# EAGLE board nav10_mxp_3_3_final_expio (EAGLE 6.5.0)
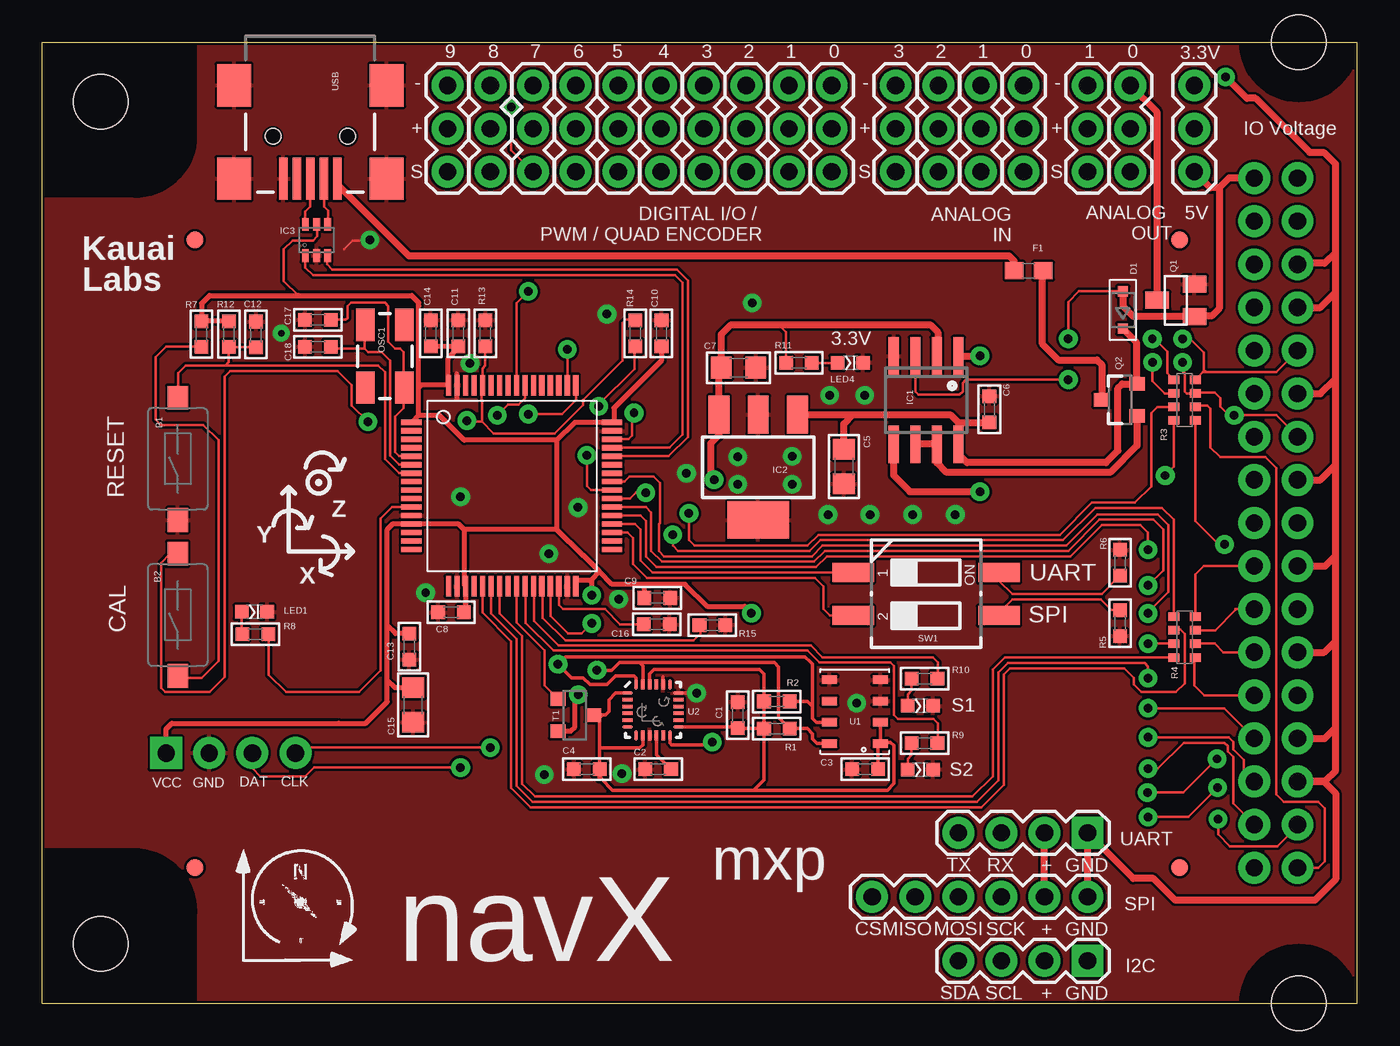
[diagram p0: board, top side]
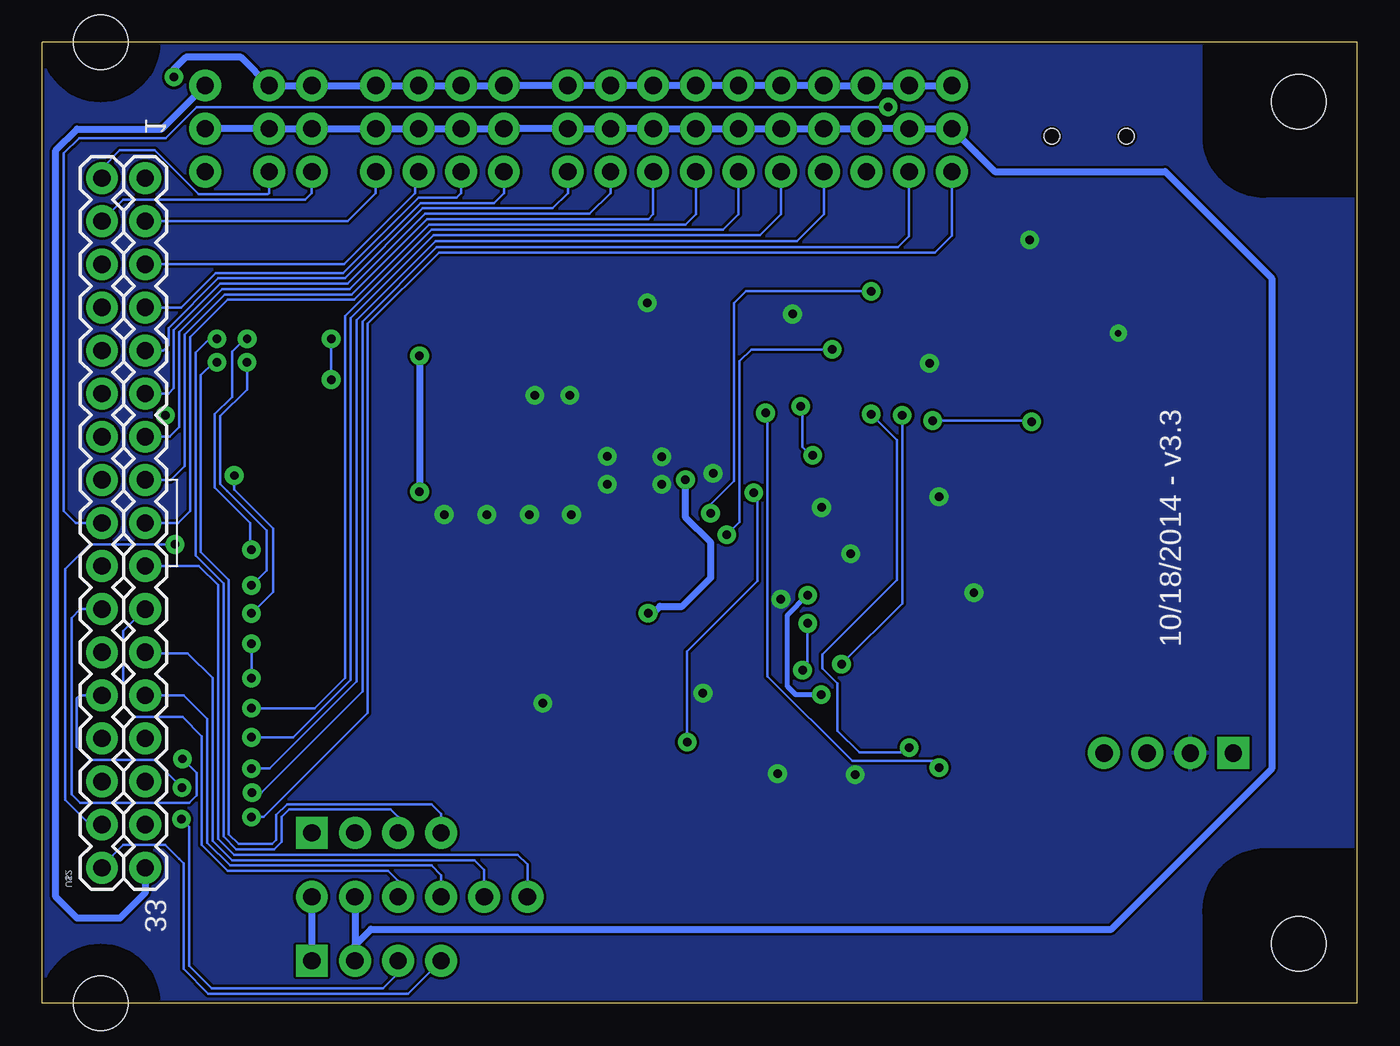
[diagram p1: board, bottom side, seen from below]

Size 77.47 x 56.64 mm. Coordinates in mm from the lower left corner, seen from the top.
Outline: 0,0 77.47,0 77.47,56.64 0,56.64 0,0
Copper layers (1*16): Top 0.018mm / dielectric 1.5mm / Bottom 0.018mm
Design rules "es-015mm *": minimum track width 0.15mm, minimum drill 0.4mm, track to track 0.15mm, track to pad 0.15mm, pad to pad 0.15mm, via to via 0.15mm, smd to smd 0.15mm, copper to edge 0.15mm, drill to drill 0.15mm, minimum pad ring 0.4mm, minimum via ring 0.3mm, stop-mask expansion 0mil, vias tented up to drill 25mil, thermal gap 0.15mm
Net classes: 2 RF: width 0.635 mm, clearance 0.762 mm
tRestrict: 6 lines
bRestrict: 6 lines

## Footprints (pad centres in the part's own frame; a part is rotated, then mirrored left to right if it is on the bottom)
TACTILE-SWITCH-1101NE = smd 1.4 x 1.2: P$1 -3.6,0; P$2 3.6,0
C0603 = smd 0.8 x 0.8: 1 -0.762,0; 2 0.762,0
C0805 = smd 1.2 x 1.3: 1 -1.016,0; 2 1.016,0
SOD-323 = smd 0.6 x 0.6: A 1.1,0; C -1.1,0
0603 = smd 1.1 x 1: 1 -0.85,0; 2 0.85,0
SO08 = smd 0.6 x 2.2: 1 -1.905,-2.6; 2 -0.635,-2.6; 3 0.635,-2.6; 4 1.905,-2.6; 5 1.905,2.6; 6 0.635,2.6; 7 -0.635,2.6; 8 -1.905,2.6
MCP1703DB = smd 1.219 x 2.235: 1 -2.311,-3.099; 2 0,-3.099; 3 2.311,-3.099 | smd 3.6 x 2.2: 4 0,3.099
SC70-6 = smd 0.4 x 0.75: 1 -0.65,-0.925; 2 0,-0.925; 3 0.65,-0.925; 4 0.65,0.925; 5 0,0.925; 6 -0.65,0.925
1X03 = drill 1.016 pad 1.88: 1 0,0; 2 2.54,0; 3 5.08,0
1X04 = drill 1.016 pad 1.88 square: 1 0,0 | drill 1.016 pad 1.88: 2 2.54,0; 3 5.08,0; 4 7.62,0
1X06 = drill 1.016 pad 1.88: 1 0,0; 2 2.54,0; 3 5.08,0; 4 7.62,0; 5 10.16,0; 6 12.7,0
FIDUCIAL-1X2 = smd 1 x 1: 1 0,0
CHIP-LED0603 = smd 0.8 x 0.8: A 0,-0.75; C 0,0.75
CRYSTAL-SMD-5X3 = smd 1.9 x 1.1: 1 -1.85,-1.15; 2 1.85,-1.15; 3 1.85,1.15; 4 -1.85,1.15
SOT23 = smd 1 x 1.4: 1 -0.95,-1.1; 2 0.95,-1.1; 3 0,1.1
SOT23-3 = smd 0.8 x 0.9: 1 -0.95,-1; 2 0.95,-1; 3 0,1.1
R0603 = smd 0.8 x 0.8: 1 -0.762,0; 2 0.762,0
0603_ARV = smd 0.5 x 0.65: 1 -1.2,-0.625; 2 -0.4,-0.625; 3 0.4,-0.625; 4 1.2,-0.625; 5 1.2,0.625; 6 0.4,0.625; 7 -0.4,0.625; 8 -1.2,0.625
CTS-219-02 = smd 1.13 x 2.44: 1 -1.27,-4.3; 2 1.27,-4.3; 3 1.27,4.3; 4 -1.27,4.3
MS5611 = smd 0.9 x 0.5: 1 -1.5,1.875; 2 -1.5,0.625; 3 -1.5,-0.625; 4 -1.5,-1.875; 5 1.5,-1.875; 6 1.5,-0.625; 7 1.5,0.625; 8 1.5,1.875
QFN24_3MM_INVENSENSE = smd 0.6 x 0.2: 1 -1.5,1; 2 -1.5,0.6; 3 -1.5,0.2; 4 -1.5,-0.2; 5 -1.5,-0.6; 6 -1.5,-1; 13 1.5,-1; 14 1.5,-0.6; 15 1.5,-0.2; 16 1.5,0.2; 17 1.5,0.6; 18 1.5,1 | smd 0.2 x 0.6: 7 -1,-1.5; 8 -0.6,-1.5; 9 -0.2,-1.5; 10 0.2,-1.5; 11 0.6,-1.5; 12 1,-1.5; 19 1,1.5; 20 0.6,1.5; 21 0.2,1.5; 22 -0.2,1.5; 23 -0.6,1.5; 24 -1,1.5
1X04_NO_SILK = drill 1.016 pad 1.88 square: 1 0,0 | drill 1.016 pad 1.88: 2 2.54,0; 3 5.08,0; 4 7.62,0
2X17 = drill 1.016 pad 1.88: 1 0,0; 2 0,-2.54; 3 -2.54,0; 4 -2.54,-2.54; 5 -5.08,0; 6 -5.08,-2.54; 7 -7.62,0; 8 -7.62,-2.54; 9 -10.16,0; 10 -10.16,-2.54; 11 -12.7,0; 12 -12.7,-2.54; 13 -15.24,0; 14 -15.24,-2.54; 15 -17.78,0; 16 -17.78,-2.54; 17 -20.32,0; 18 -20.32,-2.54; 19 -22.86,0; 20 -22.86,-2.54; 21 -25.4,0; 22 -25.4,-2.54; 23 -27.94,0; 24 -27.94,-2.54; 25 -30.48,0; 26 -30.48,-2.54; 27 -33.02,0; 28 -33.02,-2.54; 29 -35.56,0; 30 -35.56,-2.54; 31 -38.1,0; 32 -38.1,-2.54; 33 -40.64,0; 34 -40.64,-2.54
MXP_STANDOFF_FRONT = hole 3.2: 0,0
MXP_STANDOFF_REAR = hole 3.2: 0,0
TQFP-10X10-64 = smd 1.2 x 0.3: P$1 -5.936,3.75; P$2 -5.936,3.25; P$3 -5.936,2.75; P$4 -5.936,2.25; P$5 -5.936,1.75; P$6 -5.936,1.25; P$7 -5.936,0.75; P$8 -5.936,0.25; P$9 -5.936,-0.25; P$10 -5.936,-0.75; P$11 -5.936,-1.25; P$12 -5.936,-1.75; P$13 -5.936,-2.25; P$14 -5.936,-2.75; P$15 -5.936,-3.25; P$16 -5.936,-3.75; P$33 5.886,-3.75; P$34 5.886,-3.25; P$35 5.886,-2.75; P$36 5.886,-2.25; P$37 5.886,-1.75; P$38 5.886,-1.25; P$39 5.886,-0.75; P$40 5.886,-0.25; P$41 5.886,0.25; P$42 5.886,0.75; P$43 5.886,1.25; P$44 5.886,1.75; P$45 5.886,2.25; P$46 5.886,2.75; P$47 5.886,3.25; P$48 5.886,3.75 | smd 0.3 x 1.2: P$17 -3.75,-5.911; P$18 -3.25,-5.911; P$19 -2.75,-5.911; P$20 -2.25,-5.911; P$21 -1.75,-5.911; P$22 -1.25,-5.911; P$23 -0.75,-5.911; P$24 -0.25,-5.911; P$25 0.25,-5.911; P$26 0.75,-5.911; P$27 1.25,-5.911; P$28 1.75,-5.911; P$29 2.25,-5.911; P$30 2.75,-5.911; P$31 3.25,-5.911; P$32 3.75,-5.911; P$49 3.75,5.936; P$50 3.25,5.936; P$51 2.75,5.936; P$52 2.25,5.936; P$53 1.75,5.936; P$54 1.25,5.936; P$55 0.75,5.936; P$56 0.25,5.936; P$57 -0.25,5.936; P$58 -0.75,5.936; P$59 -1.25,5.936; P$60 -1.75,5.936; P$61 -2.25,5.936; P$62 -2.75,5.936; P$63 -3.25,5.936; P$64 -3.75,5.936
USB-MINIB = smd 2.5 x 0.5: D+ 2.5,0; D- 2.5,0.8; GND 2.5,-1.6; ID 2.5,-0.8; VBUS 2.5,1.6 | smd 2.5 x 2: MTN1 -3,4.5; MTN2 2.5,4.5; MTN3 -3,-4.5; MTN4 2.5,-4.5 | hole 0.9: 0,2.2; 0,-2.2

## Placement (x,y rotation side)
B1  RESET  [TACTILE-SWITCH-1101NE]  7.98,32.1 90 top
B2  CAL  [TACTILE-SWITCH-1101NE]  7.98,22.9 90 top
C1  .1uF  [C0603]  40.98,17 90 top
C2  .1uF  [C0603]  36.28,13.8 180 top
C3  .1uF  [C0603]  48.48,13.8 180 top
C4  .01uF  [C0603]  32.08,13.8 180 top
C5  10uF (10V. low ESR)  [C0805]  47.22,31.64 270 top
C6  .1uF  [C0603]  55.8,35.03 270 top
C7  22uF (6V)  [C0805]  41.03,37.47 0 top
C8  1uF  [C0603]  24.08,23.05 0 top
C9  1uF  [C0603]  36.23,23.9 180 top
C10  1uF  [C0603]  36.48,39.5 270 top
C11  1uF  [C0603]  24.5,39.5 270 top
C12  .1uF  [C0603]  12.58,39.42 270 top
C13  1uF  [C0603]  21.62,21.04 90 top
C14  1uF  [C0603]  22.88,39.5 270 top
C15  10uF  [C0805]  21.85,17.59 270 top
C16  4.7uF  [C0603]  36.2,22.35 180 top
C17  18pF  [C0603]  16.23,40.3 0 top
C18  18pF  [C0603]  16.23,38.7 0 top
D1  PMEG2010 (30V, 1A)  [SOD-323]  63.66,40.87 90 top
F1  375mA  [0603]  58.12,43.18 180 top
IC1  LM358D  [SO08]  52.07,35.56 180 top
IC2  MCP1703DB  [MCP1703DB]  42.18,31.6 180 top
IC3  USBUF02W6  [SC70-6]  16.15,44.99 0 top
JP1  DIGIO9  [1X03]  23.88,49.02 90 top
JP2  DIGIO8  [1X03]  26.4,49.02 90 top
JP3  MXP_UART  [1X04]  61.59,10.06 180 top
JP4  MXP_I2C  [1X04]  61.59,2.51 180 top
JP5  MXP_SPI  [1X06]  61.59,6.29 180 top
JP6  ANO0  [1X03]  64.11,49.02 90 top
JP7  ANO1  [1X03]  61.59,49.02 90 top
JP8  AIO0  [1X03]  57.82,49.02 90 top
JP9  AIO1  [1X03]  55.31,49.02 90 top
JP10  AIO2  [1X03]  52.79,49.02 90 top
JP11  AIO3  [1X03]  50.28,49.02 90 top
JP12  IO_VOLTAGE_SELECT  [1X03]  67.88,49.02 90 top
JP13  DIGIO0  [1X03]  46.51,49.02 90 top
JP14  DIGIO1  [1X03]  43.99,49.02 90 top
JP15  DIGIO2  [1X03]  41.48,49.02 90 top
JP16  DIGIO3  [1X03]  38.97,49.02 90 top
JP17  DIGIO4  [1X03]  36.45,49.02 90 top
JP18  DIGIO5  [1X03]  33.94,49.02 90 top
JP19  DIGIO6  [1X03]  31.43,49.02 90 top
JP20  DIGIO7  [1X03]  28.91,49.02 90 top
JP21  FIDUCIAL1X2  [FIDUCIAL-1X2]  9,8 90 top
JP22  FIDUCIAL1X2  [FIDUCIAL-1X2]  9,45 0 top
JP23  FIDUCIAL1X2  [FIDUCIAL-1X2]  67,45 0 top
JP24  FIDUCIAL1X2  [FIDUCIAL-1X2]  67,8 0 top
LED1  CAL  [CHIP-LED0603]  12.49,23.08 270 top
LED2  S2  [CHIP-LED0603]  51.73,13.78 270 top
LED3  S1  [CHIP-LED0603]  51.73,17.55 270 top
LED4  3.3V  [CHIP-LED0603]  47.61,37.77 270 top
LICENSE_TEXT  CREATIVE_COMMONS  [CREATIVE_COMMONS]  59.35,71.01 180 top  (outside the outline)
OSC1  8MHz  [CRYSTAL-SMD-5X3]  20.18,38.15 270 top
Q1  IRFML8244  [SOT23]  66.79,41.44 90 top
Q2  IRLML6402  [SOT23-3]  63.5,35.57 90 top
R1  4.7K  [R0603]  43.28,16.2 180 top
R2  4.7K  [R0603]  43.28,17.8 180 top
R3  330  [0603_ARV]  67.31,35.56 90 top
R4  330  [0603_ARV]  67.31,21.59 90 top
R5  0K  [R0603]  63.5,22.42 90 top
R6  0K  [R0603]  63.5,25.97 270 top
R7  1K  [R0603]  9.37,39.45 270 top
R8  470  [R0603]  12.54,21.77 180 top
R9  470  [R0603]  51.98,15.35 180 top
R10  470  [R0603]  51.98,19.15 0 top
R11  470  [R0603]  44.58,37.75 0 top
R12  1K  [R0603]  10.99,39.45 270 top
R13  10K  [R0603]  26.1,39.5 270 top
R14  1K  [R0603]  34.93,39.5 270 top
R15  10K  [R0603]  39.48,22.3 180 top
SW1  219-02  [CTS-219-02]  52.07,24.13 270 top
T1  PDTA114ET  [SOT23-3]  31.38,17 270 top
U1  Measurement Sciences MS611  [MS5611]  47.88,17.2 180 top
U2  MPU-9250  [QFN24_3MM_INVENSENSE]  35.98,17.3 0 top
U$1  M032.54MM  [1X04_NO_SILK]  7.29,14.76 0 top
U$2  MXP_CONNECTOR  [2X17]  71.42,48.64 90 top
U$3  [MXP_STANDOFF_FRONT]  74.04,56.64 0 top
U$4  [MXP_STANDOFF_REAR]  3.43,3.51 0 top
U$5  [MXP_STANDOFF_FRONT]  74.04,0 0 top
U$7  [MXP_STANDOFF_REAR]  3.43,53.14 0 top
UC1  STM32F411  [TQFP-10X10-64]  27.68,30.5 0 top
USB  Mini-USB  [USB-MINIB]  15.79,51.11 270 top

## Library data of the parts
B1 = SparkFun_20110922_my; DIGIKEY_PART_NUMBER: CKN10388CT-ND
B2 = SparkFun_20110922_my
C1 C2 C4 C6 C9-C17 R1 R5-R9 R11-R13 R15 = rc-master-smd
C3 = rc-master-smd; DIGIKEY_PART_NUMBER: 399-1096-1-ND
C5 C7 = rc-master-smd; DIGIKEY_PART_NUMBER: 399-1158-1-ND
C8 = rc-master-smd; DIGIKEY_PART_NUMBER: 399-3118-1-ND
C18 = rc-master-smd; DIGIKEY_PART_NUMBER: 399-1052-1-ND
D1 = adafruit
F1 LICENSE_TEXT = SparkFun
IC1 = linear
IC2 = KauaiFusionLabs; DIGIKEY_PART_NUMBER: MCP1703T-3302E/DBCT-ND
IC3 = es; DIGIKEY_PART_NUMBER: 497-3743-1-ND
JP1-JP20 U$1 = SparkFun-Connectors
JP21-JP24 = SparkFun-Aesthetics
LED1 = led
LED2 LED3 = led; DIGIKEY_PART_NUMBER: 475-1409-1-ND
LED4 = led; DIGIKEY_PART_NUMBER: 475-3016-1-ND
OSC1 = SparkFun; DIGIKEY_PART_NUMBER: 887-1452-1-ND
Q1 = SparkFun-DiscreteSemi; DIGIKEY_PART_NUMBER: DMN3404LDICT-ND; PROD_ID: TRANS-08345
Q2 = SparkFun-DiscreteSemi
R2 = rc-master-smd; DIGIKEY_PART_NUMBER: 311-4.70KHRCT-ND
R3 R4 = SparkFun-Passives; DIGIKEY_PART_NUMBER: YC164J-1.0KCT-ND
R10 = rc-master-smd; DIGIKEY_PART_NUMBER: 1276-5054-1-ND
R14 = rc-master-smd; DIGIKEY_PART_NUMBER: 311-1.00KHRCT-ND
SW1 = switch-dil; OC_FARNELL: unknown; OC_NEWARK: unknown
T1 = es; DIGIKEY_PART_NUMBER: 568-6425-1-ND
U1 = KauaiFusionLabs; DIGIKEY_PART_NUMBER: MPL115A2-ND
U2 = KauaiFusionLabs; DESCRIPTRION: IC MOTION PROCESSOR 24-QFN; DIGIKEY_PART_NUMBER: 1428-1019-1-ND; MANUFACTURER: INVENSENSE
U$2-U$5 U$7 = KauaiFusionLabs
UC1 = st-microelectronics; DIGIKEY_PART_NUMBER: 497-11154-ND
USB = SparkFun_20110922_my; DIGIKEY_PART_NUMBER: 151-1206-1-ND

## Nets
+3.3V_MXP: JP12.3 U$2.33
+5V [vcc]: F1.1 Q2.3
+5V_MXP: D1.A IC1.3 JP12.1 Q1.1 U$2.1
/I2C_DEV_ON: T1.1 UC1.P$25
AI0_MXP: JP8.1 U$2.3
AI1_MXP: JP9.1 U$2.5
AI2_MXP: JP10.1 U$2.7
AI3_MXP: JP11.1 U$2.9
AO0_MXP: JP6.1 U$2.2
AO1_MXP: JP7.1 U$2.4
BOOT0_60: B2.P$2 R13.2 R14.1 UC1.P$60
BOOT1_28: R15.2 UC1.P$28
CAL_LED: R8.1 UC1.P$11
GND: B1.P$1 C1.2 C2.2 C3.2 C4.2 C5.2 C6.1 C7.2 C8.1 C9.1 C10.1 C11.1 C12.1 C13.1 C14.1 C15.2 C16.1 C17.1 C18.1 IC1.4 IC2.2 IC2.4 IC3.2 LED1.C LED2.C LED3.C LED4.C Q1.2 R5.1 R6.1 R13.1 R15.1 U1.3 U1.4 U1.5 U2.9 U2.18 U2.20 U$1.2 UC1.P$12 UC1.P$18 UC1.P$31 UC1.P$47 UC1.P$63 USB.GND USB.MTN1 USB.MTN2 USB.MTN3 USB.MTN4
GND_MXP: JP1.3 JP2.3 JP3.1 JP4.1 JP5.1 JP6.3 JP7.3 JP8.3 JP9.3 JP10.3 JP11.3 JP13.3 JP14.3 JP15.3 JP16.3 JP17.3 JP18.3 JP19.3 JP20.3 Q1.3 U$2.6 U$2.8 U$2.12 U$2.16 U$2.20 U$2.24 U$2.28 U$2.30
I2C2_SCL: R1.1 U1.8 U2.23 UC1.P$29
I2C2_SDA: R2.1 U1.7 U2.24 UC1.P$55
I2C3_SCL: R3.8 UC1.P$41
I2C3_SDA: R3.7 UC1.P$56
I2C_SCL_MXP: JP4.3 R3.1 U$2.32
I2C_SDA_MXP: JP4.4 R3.2 U$2.34
MPU6050_INT: U2.12 UC1.P$39
MXP_IO_POWER: JP1.2 JP2.2 JP3.2 JP4.2 JP5.2 JP6.2 JP7.2 JP8.2 JP9.2 JP10.2 JP11.2 JP12.2 JP13.2 JP14.2 JP15.2 JP16.2 JP17.2 JP18.2 JP19.2 JP20.2
N$1: C2.1 U2.10
N$2: B2.P$1 R7.2
N$3: LED3.A R10.1
N$4: C16.2 UC1.P$30
N$5: LED2.A R9.2
N$6: R6.2 SW1.4
N$7: C5.1 C6.2 D1.C IC1.8 IC2.1 Q2.2
N$8: R5.2 SW1.3
N$9: IC1.1 IC1.5
N$10: IC1.6 IC1.7 Q2.1
N$11: LED1.A R8.2
N$14: IC3.4 USB.D-
N$17: IC3.6 USB.D+
N$18: LED4.A R11.2
N$54 [vcc]: F1.2 USB.VBUS
NRST_7: B1.P$2 C12.2 R12.2 UC1.P$7
OSC_IN_5: C17.2 OSC1.3 UC1.P$5
OSC_OUT_6: C18.2 OSC1.1 UC1.P$6
OTG_FS_USBDM: IC3.3 UC1.P$44
OTG_FS_USBDP: IC3.1 UC1.P$45
PC9_40: R14.2 UC1.P$40
PWM0_MXP: JP13.1 U$2.11
PWM1_MXP: JP14.1 U$2.13
PWM2_MXP: JP15.1 U$2.15
PWM3_MXP: JP16.1 U$2.17
PWM4_MXP: JP17.1 U$2.27
PWM5_MXP: JP18.1 U$2.29
PWM6_MXP: JP19.1 U$2.31
PWM7_MXP: JP20.1 U$2.18
PWM8_MXP: JP2.1 U$2.22
PWM9_MXP: JP1.1 U$2.26
S1_LED: R9.1 UC1.P$26
S2_LED: R10.2 UC1.P$27
SPI1_MISO: R4.7 UC1.P$22
SPI1_MOSI: R4.8 UC1.P$23
SPI1_NSS: R4.5 UC1.P$50
SPI1_SCK: R4.6 UC1.P$21
SPI_CS_MXP: JP5.6 R4.4 U$2.19
SPI_ENABLE: SW1.2 UC1.P$35
SPI_MISO_MXP: JP5.5 R4.2 U$2.23
SPI_MOSI_MXP: JP5.4 R4.1 U$2.25
SPI_SCK_MXP: JP5.3 R4.3 U$2.21
SWCLK_49: U$1.4 UC1.P$49
SWDAT_46: U$1.3 UC1.P$46
UART6_RX: R3.6 UC1.P$38
UART6_TX: R3.5 UC1.P$37
UART_ENABLE: SW1.1 UC1.P$36
UART_RX_MXP: JP3.3 R3.4 U$2.10
UART_TX_MXP: JP3.4 R3.3 U$2.14
VCC [vcc]: C7.1 C8.2 C9.2 C10.2 C11.2 C13.2 C14.2 C15.1 IC1.2 IC2.3 IC3.5 R7.1 R11.1 R12.1 T1.2 U$1.1 UC1.P$1 UC1.P$13 UC1.P$19 UC1.P$32 UC1.P$48 UC1.P$64
VCC_I2C_3_3V [vcc]: C1.1 C3.1 C4.1 R1.2 R2.2 T1.3 U1.1 U1.2 U2.1 U2.8 U2.13 U2.22

## Tracks (layer width: path | path; a pad name or v marks a point on that pad's centre or on a via)
+3.3V_MXP
  Bottom 0.406: U$2.33 71.42,6.51 72.91,5.03 75.42,5.03 76.68,6.29 76.68,50.28 75.42,51.54 70.44,51.54 JP12.3
+5V
  Top 0.406: F1.1 58.93,43.14 58.93,38.86 59.86,37.93 62.15,37.93 62.42,37.66 62.42,35.59 Q2.3
+5V_MXP  (via drill 0.5)
  Top 0.15: IC1.3 51.44,36.07 51.63,35.88 54.04,35.88 54.23,36.07 54.23,36.58 54.42,36.77 v60.45,36.77 | v60.45,39.18 60.45,41.34 61.09,41.97 D1.A | 63.89,41.75 D1.A | 63.69,41.95 D1.A
  Top 0.406: U$2.1 69.91,48.64 69.34,48.07 | U$2.1 69.98,48.64 | 69.34,48.07 69.34,40.96 68.9,40.51 67.91,40.51 Q1.1 64.28,40.49 63.69,41.08 63.69,41.95 | 71.04,49.02 U$2.1 | 69.34,48.07 68.83,48.07 JP12.1
  Bottom 0.15: v60.45,39.18 v60.45,36.77
/I2C_DEV_ON
  Top 0.15: UC1.P$25 27.93,22.45 29.58,20.8 29.58,18.75 T1.1
AI0_MXP
  Bottom 0.15: U$2.3 59.49,46.1 57.82,47.77 JP8.1
AI1_MXP
  Bottom 0.15: U$2.5 59.7,43.56 55.5,47.77 55.5,48.83 JP9.1
AI2_MXP
  Bottom 0.15: U$2.7 69.28,41.02 67.25,43.05 59.75,43.05 55.31,47.5 53.06,47.5 52.79,47.77 JP10.1
AI3_MXP
  Bottom 0.15: U$2.9 70.36,38.48 70.04,38.8 70.04,39.81 67.12,42.74 59.63,42.74 55.18,47.18 50.87,47.18 50.28,47.77 JP11.1
AO0_MXP
  Bottom 0.15: U$2.2 73.96,49.23 72.91,50.28 70.85,50.28 68.26,47.69 64.18,47.69 64.11,47.77 JP6.1
AO1_MXP
  Bottom 0.15: U$2.4 73.96,46.12 72.71,47.37 61.99,47.37 61.59,47.77 JP7.1
BOOT0_60  (via drill 0.5)
  Top 0.15: 25.98,36.39 UC1.P$60 | UC1.P$60 25.88,36.39 25.88,35.6 25.91,35.57 25.91,34.29 | R14.1 34.89,40.3 34.38,40.3 34.18,40.1 34.18,37.9 31.84,35.56 31.84,35.27 30.17,33.6 26.6,33.6 25.91,34.29 | 25.91,34.29 25.08,34.29 v25.02,34.35 | B2.P$2 7.51,26.5 6.99,25.97 6.99,18.61 7.24,18.35 9.84,18.35 10.73,19.24 10.73,36.96 11.05,37.27 17.4,37.27 18.22,36.45 18.22,35.25 v19.19,34.29 | UC1.P$60 25.93,37.42 26.1,37.59 R13.2
  Bottom 0.15: v25.02,34.35 19.25,34.35 v19.19,34.29
BOOT1_28
  Top 0.15: UC1.P$28 29.48,24.54 29.48,22.73 30.82,21.4 38.38,21.4 38.78,21.8 38.78,22.24 R15.2
CAL_LED
  Top 0.15: UC1.P$11 20.61,29.25 19.94,28.57 19.94,19.62 18.67,18.35 14.35,18.35 13.34,19.37 13.34,21.74 R8.1
GND  (via drill 0.4, 0.5)
  Top 0.15: 17.79,44.46 18.29,44.96 19.63,44.96
  Top 0.2: U2.20 36.58,19.25 | U2.18 v38.54,18.3 v38.54,18.29
  Top 0.3: 24.43,35.65 24.43,37.1
  Bottom 0.2: v38.54,18.29 38.67,18.29 38.67,17.91
  other vias: 33.27,40.63 24.64,29.87 33.95,23.83 25.2,37.73 37.95,31.25 47.98,17.7 44.19,32.25 44.19,30.6 22.58,24.2 40.97,32.22 40.98,30.6 14.08,39.5 41.84,41.28 29.85,26.5 19.3,45.01 31.56,29.23 46.29,28.82 48.77,28.82 51.28,28.82 53.8,28.82 46.39,35.85 48.46,35.84 29.58,13.48 34.15,13.54
  pour Bottom: 77.47,56.64 77.47,0 0,0 0.15,20.07 0,20.07 0,56.64
  pour Top: 0,0 0,56.64 77.47,56.64 77.47,0
GND_MXP  (via drill 0.5)
  Top 0.406: 76.2,16.26 76.2,13.72 75.56,13.08 U$2.30 75.5,13.08 76.2,12.38 76.2,7.3 74.99,6.1 66.74,6.1 65.47,7.37 64.28,7.37 JP3.1 JP5.1 | 76.2,16.26 76.2,21.37 | 76.2,21.37 76.2,26.4 | 76.2,26.4 76.2,31.75 | U$2.16 75.31,30.86 76.2,31.75 | U$2.28 75.56,15.62 76.2,16.26 | U$2.24 75.53,20.7 76.2,21.37 | U$2.20 75.58,25.78 76.2,26.4 | 76.2,31.75 76.2,36.83 | 76.2,36.83 76.2,41.91 | 76.2,41.91 76.2,44.26 | 76.2,44.26 76.2,49.47 75.5,50.16 74.68,50.16 71.5,53.34 70.98,53.34 v69.72,54.6 | U$2.12 75.31,35.94 76.2,36.83 | U$2.8 75.31,41.02 76.2,41.91 | 76.2,44.26 75.56,43.62 74.03,43.62 U$2.6 | Q1.3 65.69,52.52 JP6.3
  Bottom 0.406: JP5.1 JP4.1 | JP1.3 JP2.3 JP20.3 JP19.3 JP18.3 JP17.3 JP16.3 JP15.3 JP14.3 JP13.3 JP11.3 JP10.3 JP9.3 JP8.3 JP7.3 JP6.3 65.76,55.75 69.03,55.75 69.72,55.05 v69.72,54.6
I2C2_SCL  (via drill 0.5)
  Top 0.15: UC1.P$29 29.93,22.85 30.98,21.8 31.78,21.8 v32.38,22.4
  Top 0.2: U1.8 45.66,15.32 45.38,15.6 45.38,15.9 45.08,16.2 R1.1 43.38,16.86 43.38,19.83 43.13,20.09 35.2,20.09 | 35.2,20.09 33.99,20.09 33.54,19.64 v32.68,19.64 | U2.23 35.38,19.9 35.2,20.09
  Bottom 0.15: v32.38,22.4 32.38,19.94 v32.68,19.64
I2C2_SDA  (via drill 0.5)
  Top 0.15: UC1.P$55 28.45,36.42 28.45,35.69 28.07,35.31 27.43,35.31 v26.8,34.67
  Top 0.2: U1.7 45.6,16.57 45.38,16.8 45.38,17.5 | R2.1 45.08,17.8 45.38,17.5 | 45.38,17.5 45.38,20 45.26,20.12 44.94,20.44 30.82,20.44 v30.38,20 31.18,19.2 31.87,19.2 32.27,18.8 33.28,18.8 33.78,19.3 34.86,19.3 34.98,19.19 U2.24
  Bottom 0.15: v26.8,34.67 26.8,23.58 v30.38,20
I2C3_SCL  (via drill 0.5)
  Top 0.15: UC1.P$41 34.31,30.75 34.61,31.05 36.01,31.05 36.39,30.67 36.39,28.32 36.32,28.26 36.32,26.67 36.64,26.35 45.34,26.35 45.97,26.99 60.33,26.99 62.17,28.83 65.72,28.83 66.36,28.19 66.36,24.26 65.15,23.05 v65.15,22.99 | R3.8 66.69,31.63 v66.17,31.11
  Bottom 0.15: v65.15,22.99 63.88,24.26 63.88,28 66.17,30.29 v66.17,31.11
I2C3_SDA  (via drill 0.5)
  Top 0.15: UC1.P$56 27.93,41.27 v28.64,41.97 | v38.1,28.89 38.1,27.3 38.42,26.99 45.09,26.99 45.72,27.62 59.94,27.62 61.85,29.53 64.39,29.53 65.34,30.48 65.34,34.8 65.7,35.16 R3.7
  Bottom 0.15: v38.1,28.89 38.1,29.4 36.7,30.8 36.7,41.27 36.01,41.97 v28.64,41.97
I2C_SCL_MXP  (via drill 0.5)
  Top 0.15: U$2.32 73.96,10.46 72.77,9.27 69.98,9.27 69.28,9.97 v69.28,10.86 | R3.1 67.94,28.43 69.31,27.05 v69.66,27.05
  Bottom 0.15: JP4.3 56.51,1.78 57.4,0.89 67.5,0.89 68.83,2.22 68.83,10.41 v69.28,10.86 | U$2.32 74.65,10.54 76.12,12.01 76.12,25.61 74.68,27.05 v69.66,27.05
I2C_SDA_MXP
  Top 0.15: R3.2 68.02,35.24 68.64,35.24 68.83,35.05 68.83,32.77 69.41,32.19 72.07,32.19 72.71,31.56 72.71,12.32 73.15,11.87 75.18,11.87 75.56,11.49 75.56,8.38 75.18,8 U$2.34
  Bottom 0.15: U$2.34 73.96,8.08 72.71,9.34 70.23,9.34 69.42,8.52 69.15,8.26 69.15,2.03 67.69,0.57 55.92,0.57 JP4.4
MPU6050_INT  (via drill 0.5)
  Top 0.15: UC1.P$39 34.63,29.75 34.98,30.1 v35.56,30.1 | 39.32,15.24 v39.48,15.4
  Top 0.2: U2.12 36.98,15.34 37.08,15.24 39.32,15.24
  Bottom 0.15: v39.48,15.4 39.48,20.75 35.33,24.9 35.33,29.86 v35.56,30.1
MXP_IO_POWER
  Top 0.406: JP5.2 JP3.2
  Bottom 0.406: JP5.2 59.05,3.43 | 59.05,3.43 58.1,4.38 14.47,4.38 5.03,13.83 5.03,42.74 11.31,49.02 21.34,49.02 JP1.2 JP2.2 JP20.2 JP19.2 JP18.2 JP17.2 JP16.2 JP15.2 JP14.2 JP13.2 JP11.2 JP10.2 JP9.2 JP8.2 JP7.2 JP6.2 JP12.2 | 59.05,3.43 JP4.2
N$1
  Top 0.2: U2.10 36.18,14.66 C2.1
N$2
  Top 0.15: B2.P$1 8.08,19.2 9.38,19.2 10.38,20.2 10.38,33.2 9.48,34.1 6.98,34.1 6.68,34.4 6.68,38.1 7.3,38.72 9.34,38.72 R7.2
N$3
  Top 0.15: R10.1 51.22,18.45 50.99,18.22 LED3.A
N$4
  Top 0.15: UC1.P$30 30.43,23.48 30.67,23.24 33.15,23.24 34.04,22.35 C16.2
N$5
  Top 0.15: R9.2 51.22,14.64 50.99,14.41 50.99,13.79 LED2.A
N$6
  Top 0.15: SW1.4 56.37,24.91 57.15,24.13 62.42,24.13 R6.2
N$7
  Top 0.305: 55.64,34.23 55.77,34.23 C6.2
  Top 0.406: 47.77,34.7 IC2.1 45.18,34.7 | 47.77,34.7 53.5,34.7 53.98,34.23 | 53.98,34.23 IC1.8 53.98,32.38 54.48,31.88 62.67,31.88 63.37,32.58 63.37,36.26 63.63,36.51 Q2.2 64.45,36.57 64.45,38.99 D1.C | C5.1 47.22,34.16 47.77,34.7 | 53.98,34.23 55.64,34.23
N$8
  Top 0.15: SW1.3 56.37,23.03 57.15,23.81 62.36,23.81 62.99,23.18 R5.2
N$9  (via drill 0.5)
  Top 0.406: IC1.1 v55.24,38.16 | IC1.5 50.16,31.11 51.12,30.16 v55.24,30.16
  Bottom 0.406: v55.24,38.16 v55.24,30.16
N$10
  Top 0.406: Q2.1 64.5,32.88 62.93,31.3 53.28,31.3 52.7,31.88 IC1.7 IC1.6
N$11
  Top 0.15: 11.78,22.07 R8.2 11.74,21.81 LED1.A
N$14
  Top 0.15: USB.D- 16.59,46.97 16.83,46.74 16.83,45.95 IC3.4
N$17
  Top 0.15: USB.D+ 15.79,46.97 15.49,46.67 IC3.6
N$18
  Top 0.15: R11.2 46.84,37.75 LED4.A
N$54
  Top 0.406: USB.VBUS 17.39,48.27 21.59,44.07 56.96,44.07 57.27,43.76 F1.2
NRST_7
  Top 0.15: UC1.P$7 21.03,31.25 20.18,32.1 20.18,37.2 19.78,37.6 10.79,37.6 | 10.79,37.6 8.45,37.6 8,37.15 8,35.72 B1.P$2 | 10.79,37.6 10.99,37.79 R12.2 12.56,38.69 C12.2
OSC_IN_5
  Top 0.15: 21.23,36.4 OSC1.3 | OSC1.3 21.28,36.25 21.28,35.1 20.78,34.6 20.78,32.5 21.03,32.25 UC1.P$5 | OSC1.3 21.28,36.35 21.28,38.4 21.08,38.6 20.78,38.6 20.38,39 20.38,41.1 20.18,41.3 18.18,41.3 17.98,41.1 17.98,40.4 17.88,40.3 C17.2
OSC_OUT_6
  Top 0.15: UC1.P$6 21.03,31.75 20.48,32.3 20.48,37.9 19.98,38.4 19.18,38.4 18.98,38.6 | 18.83,40.2 OSC1.1 18.98,39.95 18.98,38.6 | 18.98,38.6 17.09,38.6 C18.2
OTG_FS_USBDM
  Top 0.15: UC1.P$44 36.89,32.25 38.04,33.39 38.04,42.61 37.4,43.24 17.08,43.24 16.76,43.56 16.76,44.03 IC3.3
OTG_FS_USBDP
  Top 0.15: UC1.P$45 36.94,32.75 37.72,33.53 37.72,42.48 37.27,42.93 15.94,42.93 15.49,43.37 IC3.1
PC9_40  (via drill 0.5)
  Top 0.15: UC1.P$40 32.33,30.25 32.08,30.5 v32.08,32.3 | R14.2 34.88,38.69 34.88,37.4 32.78,35.3 v32.78,35.2
  Bottom 0.15: v32.78,35.2 32.68,35.1 32.68,32.8 32.18,32.3 v32.08,32.3
PWM0_MXP
  Bottom 0.15: U$2.11 70.04,35.94 69.72,36.26 69.72,39.69 66.99,42.42 59.5,42.42 55.05,46.86 47.41,46.86 46.51,47.77 JP13.1
PWM1_MXP
  Bottom 0.15: U$2.13 69.98,33.4 69.41,33.97 69.41,39.56 66.86,42.1 59.37,42.1 54.93,46.55 45.22,46.55 43.99,47.77 JP14.1
PWM2_MXP
  Bottom 0.15: U$2.15 69.91,30.86 69.09,31.69 69.09,39.43 66.74,41.78 59.24,41.78 54.8,46.23 41.76,46.23 41.48,46.51 JP15.1
PWM3_MXP
  Bottom 0.15: U$2.17 69.47,28.32 68.77,29.02 68.77,39.27 66.56,41.48 59.1,41.48 54.67,45.91 39.57,45.91 38.97,46.51 JP16.1
PWM4_MXP  (via drill 0.5)
  Top 0.15: v65.15,17.4 69.64,17.4 U$2.27
  Bottom 0.15: v65.15,17.4 61.42,17.4 59.63,19.19 59.63,40.51 54.55,45.59 37.37,45.59 36.45,46.51 JP17.1
PWM5_MXP  (via drill 0.5)
  Top 0.15: v65.15,15.68 69.91,15.68 70.17,15.43 70.17,14.99 70.8,14.35 70.8,13.7 U$2.29 71.36,13.02
  Bottom 0.15: v65.15,15.68 62.69,15.68 59.31,19.06 59.31,40.39 54.42,45.28 35.17,45.28 33.94,46.51 JP18.1
PWM6_MXP  (via drill 0.5)
  Top 0.15: v65.15,13.84 65.72,13.84 67.25,15.37 69.66,15.37 69.85,15.18 69.85,14.86 70.17,14.54 70.17,11.79 U$2.31
  Bottom 0.15: U$2.31 71.17,10.54 | v65.15,13.84 64.09,13.84 58.95,18.98 58.95,40.29 54.3,44.93 33,44.93 31.43,46.51 JP19.1
PWM7_MXP  (via drill 0.5)
  Top 0.15: JP20.1 28.89,49.02 27.62,50.29 v27.62,52.82 v27.63,52.83
  Bottom 0.15: v27.63,52.83 68.38,52.83 70.22,50.99 75.31,50.99 76.2,50.1 76.2,29.02 75.5,28.32 U$2.18
PWM8_MXP  (via drill 0.5)
  Top 0.15: v65.11,12.43 67.23,12.43 v69.22,14.41
  Bottom 0.15: U$2.22 75.25,23.24 75.75,22.73 75.75,12.32 75.25,11.81 68.83,11.81 68.39,12.26 68.39,13.59 v69.22,14.41 | v65.11,12.43 64.56,12.43 58.61,18.39 58.61,40.2 54.23,44.58 27.05,44.58 26.4,45.23 JP2.1
PWM9_MXP  (via drill 0.5)
  Top 0.15: v65.15,10.99 67.51,10.99 v69.24,12.71
  Bottom 0.15: U$2.26 75.25,18.16 75.44,17.97 75.44,15.11 74.68,14.35 70.88,14.35 v69.24,12.71 | v65.15,10.99 64.43,10.99 58.29,17.13 58.29,40.07 54.1,44.26 24.88,44.26 23.88,45.25 JP1.1
S1_LED
  Top 0.15: UC1.P$26 28.48,24.54 28.48,22.43 30.11,20.8 45.08,20.8 45.78,20.1 49.98,20.1 50.18,19.9 50.18,17 50.42,16.76 52.51,16.76 52.77,16.51 52.77,15.38 R9.1
S2_LED
  Top 0.15: UC1.P$27 28.98,24.54 28.98,22.54 30.41,21.1 45.28,21.1 45.98,20.4 52.48,20.4 52.78,20.1 52.78,19.19 R10.2
SPI1_MISO  (via drill 0.5)
  Top 0.15: UC1.P$22 26.43,22.98 27.94,21.47 27.94,12.83 28.89,11.87 55.07,11.87 56.34,13.14 56.34,19.51 56.9,20.07 64.96,20.07 65.15,19.88 v65.15,19.18 | v65.15,21.21 66.67,21.21 R4.7
  Bottom 0.15: v65.15,19.18 v65.15,21.21
SPI1_MOSI
  Top 0.15: UC1.P$23 26.93,22.99 28.26,21.66 28.26,12.95 29.02,12.19 54.81,12.19 56.02,13.4 56.02,19.7 56.71,20.38 66.68,20.38 R4.8
SPI1_NSS  (via drill 0.5)
  Top 0.15: R4.5 66.69,27.3 66.67,27.3 66.67,28.51 65.98,29.21 62.04,29.21 60.13,27.3 45.85,27.3 45.21,26.67 37.47,26.67 37.15,26.99 v37.15,27.62 | UC1.P$50 v30.93,38.54 v30.92,38.54
  Bottom 0.15: v30.92,38.54 35.69,38.54 36.39,37.85 36.39,28.38 v37.15,27.62
SPI1_SCK
  Top 0.15: UC1.P$21 25.93,23.04 27.62,21.35 27.62,12.7 28.77,11.56 55.32,11.56 56.66,12.89 56.66,19.38 57.02,19.75 63.75,19.75 64.33,19.18 64.33,18.8 64.77,18.35 66.8,18.35 67.31,18.86 67.31,21.78 67.06,22.04 66.64,22.04 R4.6 66.67,21.97
SPI_CS_MXP
  Top 0.15: U$2.19 68.45,25.78 67.94,25.27 R4.4
  Bottom 0.15: JP5.6 48.89,8.19 49.47,8.76 66.17,8.76 67.12,9.72 67.12,24.65 68.25,25.78 U$2.19
SPI_ENABLE
  Top 0.15: UC1.P$35 34.48,27.75 34.8,27.43 34.8,25.91 35.62,25.08 45.53,25.08 46.04,24.57 46.04,23.24 46.42,22.86 SW1.2 47.82,22.81
SPI_MISO_MXP
  Top 0.15: U$2.23 69.6,20.7 69.09,21.21 67.95,21.21 R4.2
  Bottom 0.15: JP5.5 51.43,7.87 52.01,8.45 66.29,8.45 67.44,9.59 67.44,19.18 68.9,20.64 71.36,20.64 U$2.23
SPI_MOSI_MXP
  Top 0.15: U$2.25 68.45,18.16 67.88,18.73 67.88,20.34 R4.1
  Bottom 0.15: JP5.4 53.97,7.55 54.55,8.13 66.42,8.13 67.75,9.46 67.75,16.78 69.14,18.16 U$2.25 69.82,18.16
SPI_SCK_MXP
  Top 0.15: R4.3 69.11,21.99 70.29,23.18 70.29,23.24 U$2.21
  Bottom 0.15: JP5.3 56.51,7.24 57.09,7.81 66.55,7.81 68.07,9.34 68.07,15.75 69.22,16.89 72.07,16.89 72.71,17.53 72.71,21.95 U$2.21
SWCLK_49  (via drill 0.5)
  Top 0.15: v28.64,34.73 30.61,34.73 31.43,35.56 UC1.P$49 | v26.4,15.08 15.23,15.08 U$1.4
  Bottom 0.15: 14.95,14.8 U$1.4 | v28.64,34.73 27.11,33.21 27.11,24.96 31.5,20.57 31.5,19.75 30.61,18.86 30.61,16.07 29.34,14.8 26.69,14.8 v26.4,15.08
SWDAT_46  (via drill 0.5)
  Top 0.15: v34.86,34.8 34.73,34.67 34.73,33.47 34.54,33.27 33.59,33.27 UC1.P$46 | v24.64,13.91 16,13.91 15.49,13.4 12.83,13.4 12.38,13.84 12.38,14.75 U$1.3
  Bottom 0.15: 12.32,14.71 U$1.3 | v34.86,34.8 34.73,34.67 34.73,19.29 29.73,14.29 25.02,14.29 v24.64,13.91
UART6_RX  (via drill 0.5)
  Top 0.15: UC1.P$38 35.56,29.25 35.88,28.93 35.88,26.67 36.51,26.04 45.47,26.04 46.1,26.67 60.45,26.67 62.29,28.51 65.47,28.51 66.04,27.94 66.04,25.53 v65.15,24.64 | 66.7,35.94 R3.6 66.15,35.96 65.42,36.69 v65.42,37.78
  Bottom 0.15: v65.15,24.64 64.26,25.53 64.26,27.88 66.59,30.2 66.99,30.61 66.99,34.61 65.42,36.18 v65.42,37.78
UART6_TX  (via drill 0.5)
  Top 0.15: UC1.P$37 35.24,28.75 35.56,28.43 35.56,26.35 36.2,25.72 45.59,25.72 46.23,26.35 60.58,26.35 62.42,28.19 64.71,28.19 65.15,27.75 v65.15,26.73 | 66.48,36.96 66.5,36.96 66.5,36.95 R3.5 66.29,37.15 66.29,38.42 65.53,39.18 v65.41,39.18
  Bottom 0.15: v65.15,26.73 65.22,26.8 65.22,28.32 67.31,30.42 67.31,34.73 66.29,35.75 66.29,38.42 65.53,39.18 v65.41,39.18
UART_ENABLE
  Top 0.15: UC1.P$36 34.92,28.25 35.24,27.93 35.24,26.1 35.94,25.4 SW1.1
UART_RX_MXP  (via drill 0.5)
  Top 0.15: U$2.10 73.96,38.46 72.71,37.21 68.58,37.21 | 68.58,37.21 68.39,37.21 R3.4 | v67.18,39.18 67.63,39.18 68.45,38.35 68.45,37.34 68.58,37.21
  Bottom 0.15: JP3.3 56.51,10.98 56.96,11.43 62.93,11.43 63.37,10.99 63.37,9.53 63.82,9.08 64.83,9.08 65.36,9.08 66.04,9.08 66.8,9.84 66.8,24.77 68.45,26.42 68.45,38.35 67.63,39.18 v67.18,39.18
UART_TX_MXP  (via drill 0.5)
  Top 0.15: U$2.14 73.96,33.42 72.71,34.67 v70.23,34.67 69.91,34.67 69.41,35.18 69.41,35.69 69.09,36.01 67.98,36.01 R3.3 67.92,35.94 67.44,35.94 67.31,36.07 67.31,37.15 67.18,37.27 v67.18,37.78
  Bottom 0.15: JP3.4 53.97,11.17 54.55,11.75 63.06,11.75 63.69,11.11 63.69,9.65 63.94,9.4 65.91,9.4 66.48,9.97 66.48,24.96 68.14,26.61 68.14,37.03 67.39,37.78 v67.18,37.78
VCC  (via drill 0.5)
  Top 0.15: R11.1 43.82,39.55 43.37,40.01 | 15.08,41.72 14.22,42.58 14.22,44.45 14.73,44.96 15.94,44.96 16.19,45.21 16.19,45.88 IC3.5
  Top 0.3: UC1.P$32 31.43,24.95 | UC1.P$48 31.36,34.25 | UC1.P$19 24.88,24.64 24.88,27.91 24.85,27.94 | 21.87,18.59 C15.1 20.77,18.6 20.32,19.05 | 22.18,34.69 22.18,36.3 | 22.18,36.3 22.18,41.1 | 22.18,34.69 UC1.P$1 | 22.18,34.69 23.36,34.69 24.85,33.2 30.31,33.2 30.31,27.94 | UC1.P$64 22.32,36.44 22.18,36.3 | 32.83,25.45 31.85,26.43 31.82,26.43 30.31,27.94 | 24.93,23.56 24.93,23.14 C8.2 | 30.31,27.94 24.85,27.94 | 24.85,27.94 24.54,28.25 UC1.P$13 20.63,28.25 20.32,27.94 20.32,22.29 | 17.46,16.51 19.05,16.51 20.32,17.78 20.32,19.05 | 20.32,19.05 20.32,22.29 | C13.2 20.81,21.8 20.32,22.29 | R12.1 R7.1
  Top 0.305: 30.33,16.05 T1.2 31.13,16.05 31.38,16.3 31.38,18 v31.58,18.2 | v32.38,24.06 32.38,24.8 | 31.43,24.95 32.23,24.95 32.38,24.8 | 32.38,24.8 32.38,25 32.83,25.45 33.58,24.7 35.48,24.7 | 33.58,34.26 UC1.P$48 33.68,34.36 33.68,35.1 36.48,37.9 C10.2 36.48,38.4 | 30.31,33.2 31.36,34.25 | 35.48,24.7 37.88,24.7 39.18,23.4 41.38,23.4 v41.78,23 41.78,22.6 | C9.2 35.47,24.69 35.48,24.7 | UC1.P$64 23.88,36.49 23.88,38 24.38,38.5 24.38,38.62 C11.2 C14.2 | UC1.P$19 24.93,23.56 | 22.18,41.1 22.18,41.3 21.76,41.72 15.08,41.72 9.84,41.72 9.37,41.25 R7.1 | 21.84,18.59 C15.1 | U$1.1 7.29,16.18 7.62,16.51 17.46,16.51
  Top 0.406: IC1.2 52.77,38.22 52.77,39.56 52.32,40.01 43.37,40.01 40.58,40.01 40.01,39.44 C7.1 39.88,37.34 IC2.3 39.88,34.69 39.88,33.5 39.38,33 39.38,31.07 v39.58,30.87
  Bottom 0.305: v31.58,18.2 33.08,18.2 33.58,18.7 33.58,22.86 v32.38,24.06
  Bottom 0.406: v41.78,23 41.48,23 41.08,23.4 39.78,23.4 38.08,25.1 38.08,27.16 39.56,28.64 39.56,30.86 v39.58,30.87
VCC_I2C_3_3V
  Top 0.2: U2.1 33.78,18.3 33.38,17.9 33.38,17.2 33.18,17 33.02,17 | U2.22 35.78,19.43 36.03,19.69 42.26,19.69 42.52,19.43 R2.2 R1.2 | T1.3 33.02,17 | U1.1 U1.2 | 49.45,15.4 49.98,15.4 50.18,15.2 50.18,12.97 49.78,12.57 41.91,12.57 | C3.1 49.24,15.19 | U2.13 40.92,16.3 | R1.2 42.52,13.18 41.91,12.57 | R1.2 41.02,16.2 | 32.84,13.26 C4.1 32.84,15.05 | 32.91,13.26 33.59,12.57 41.91,12.57 | 32.84,15.05 32.84,16.82 33.02,17 | U2.8 35.38,15.25 35.18,15.05 32.84,15.05
  Top 0.305: C4.1 32.84,13.27 | 49.45,15.4 U1.1 49.24,15.19 | 40.92,16.3 C1.1 41.02,16.2 | 32.84,13.26 32.91,13.26
  Top 0.406: 49.3,16.5 U1.2

## Text on the board
tPlace: Kauai | Labs | Z | Y | X | DAT | CLK | mxp | navX
bPlace: 10/18/2014 - v3.3
tNames: 9 | 8 | 7 | 6 | 5 | 4 | 3 | 2 | 1 | 0 | 3 | 2 | 1 | 0 | 1 | 0 | 3.3V | - | - | - | + | + | + | IO Voltage | S | S | S | DIGITAL I/O / / PWM / QUAD ENCODER | ANALOG / IN | ANALOG / OUT | 5V | 3.3V | UART | SPI | VCC | GND | UART | TX | RX | + | GND | SPI | CS | MISO | MOSI | SCK | + | GND | I2C | SDA | SCL | + | GND
Reference: Scott Libert, 8/2014